# EAGLE board Rear (EAGLE 8.4.1), part 1 of 2
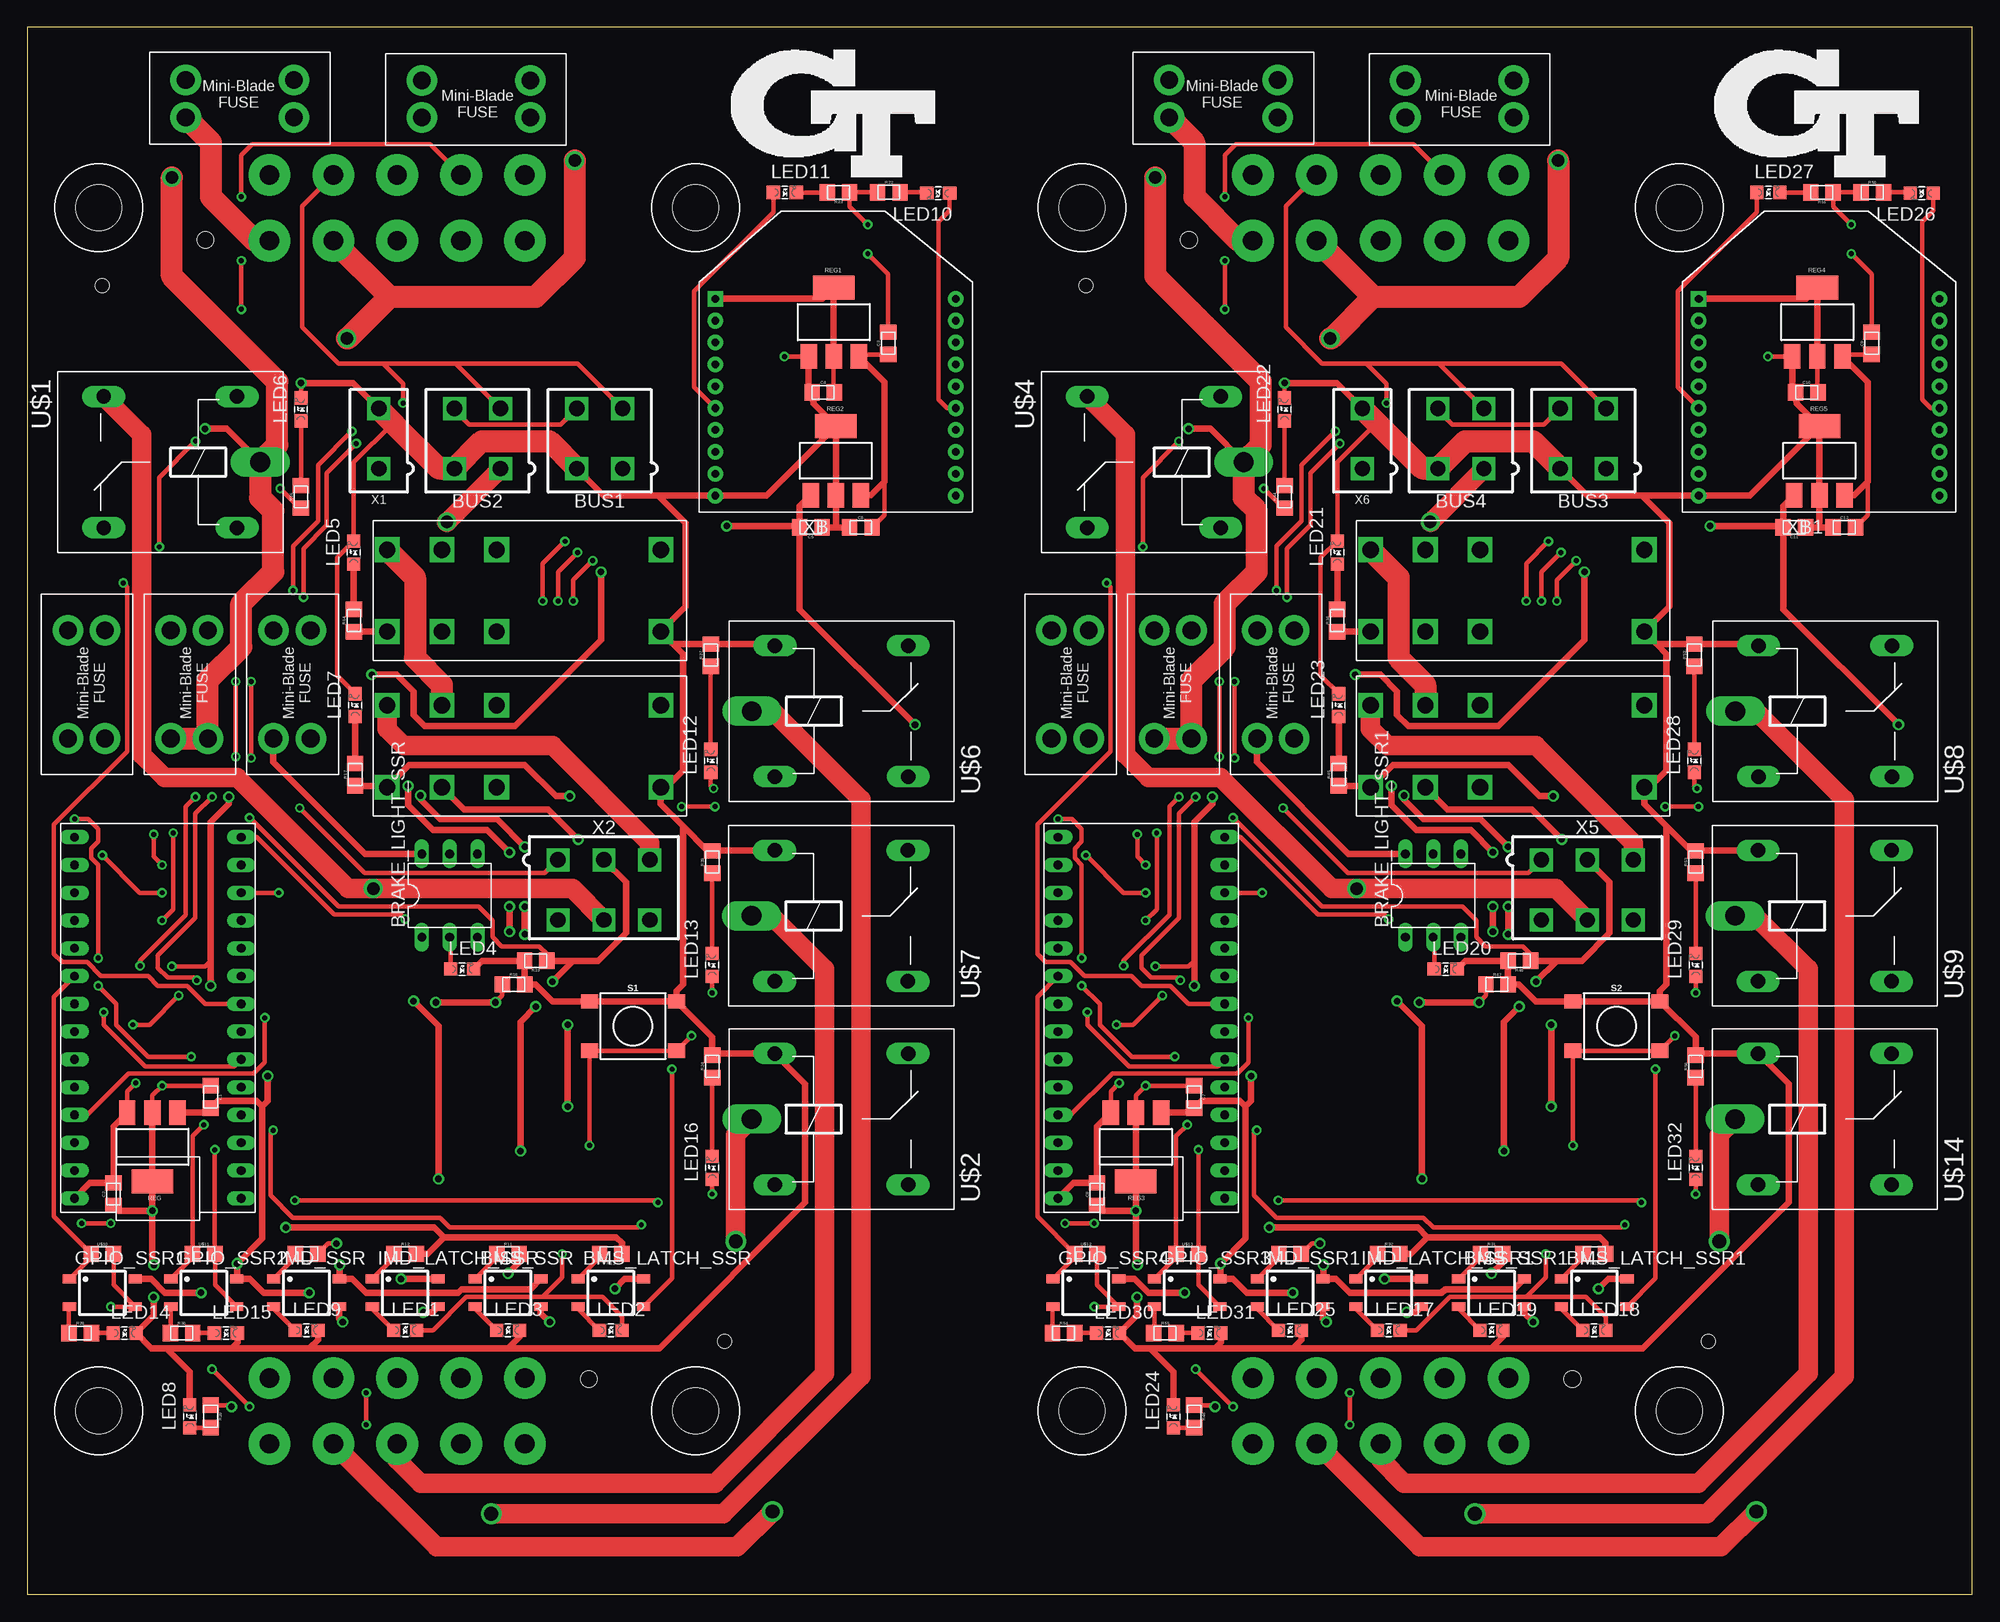
[diagram p0: board, top side]
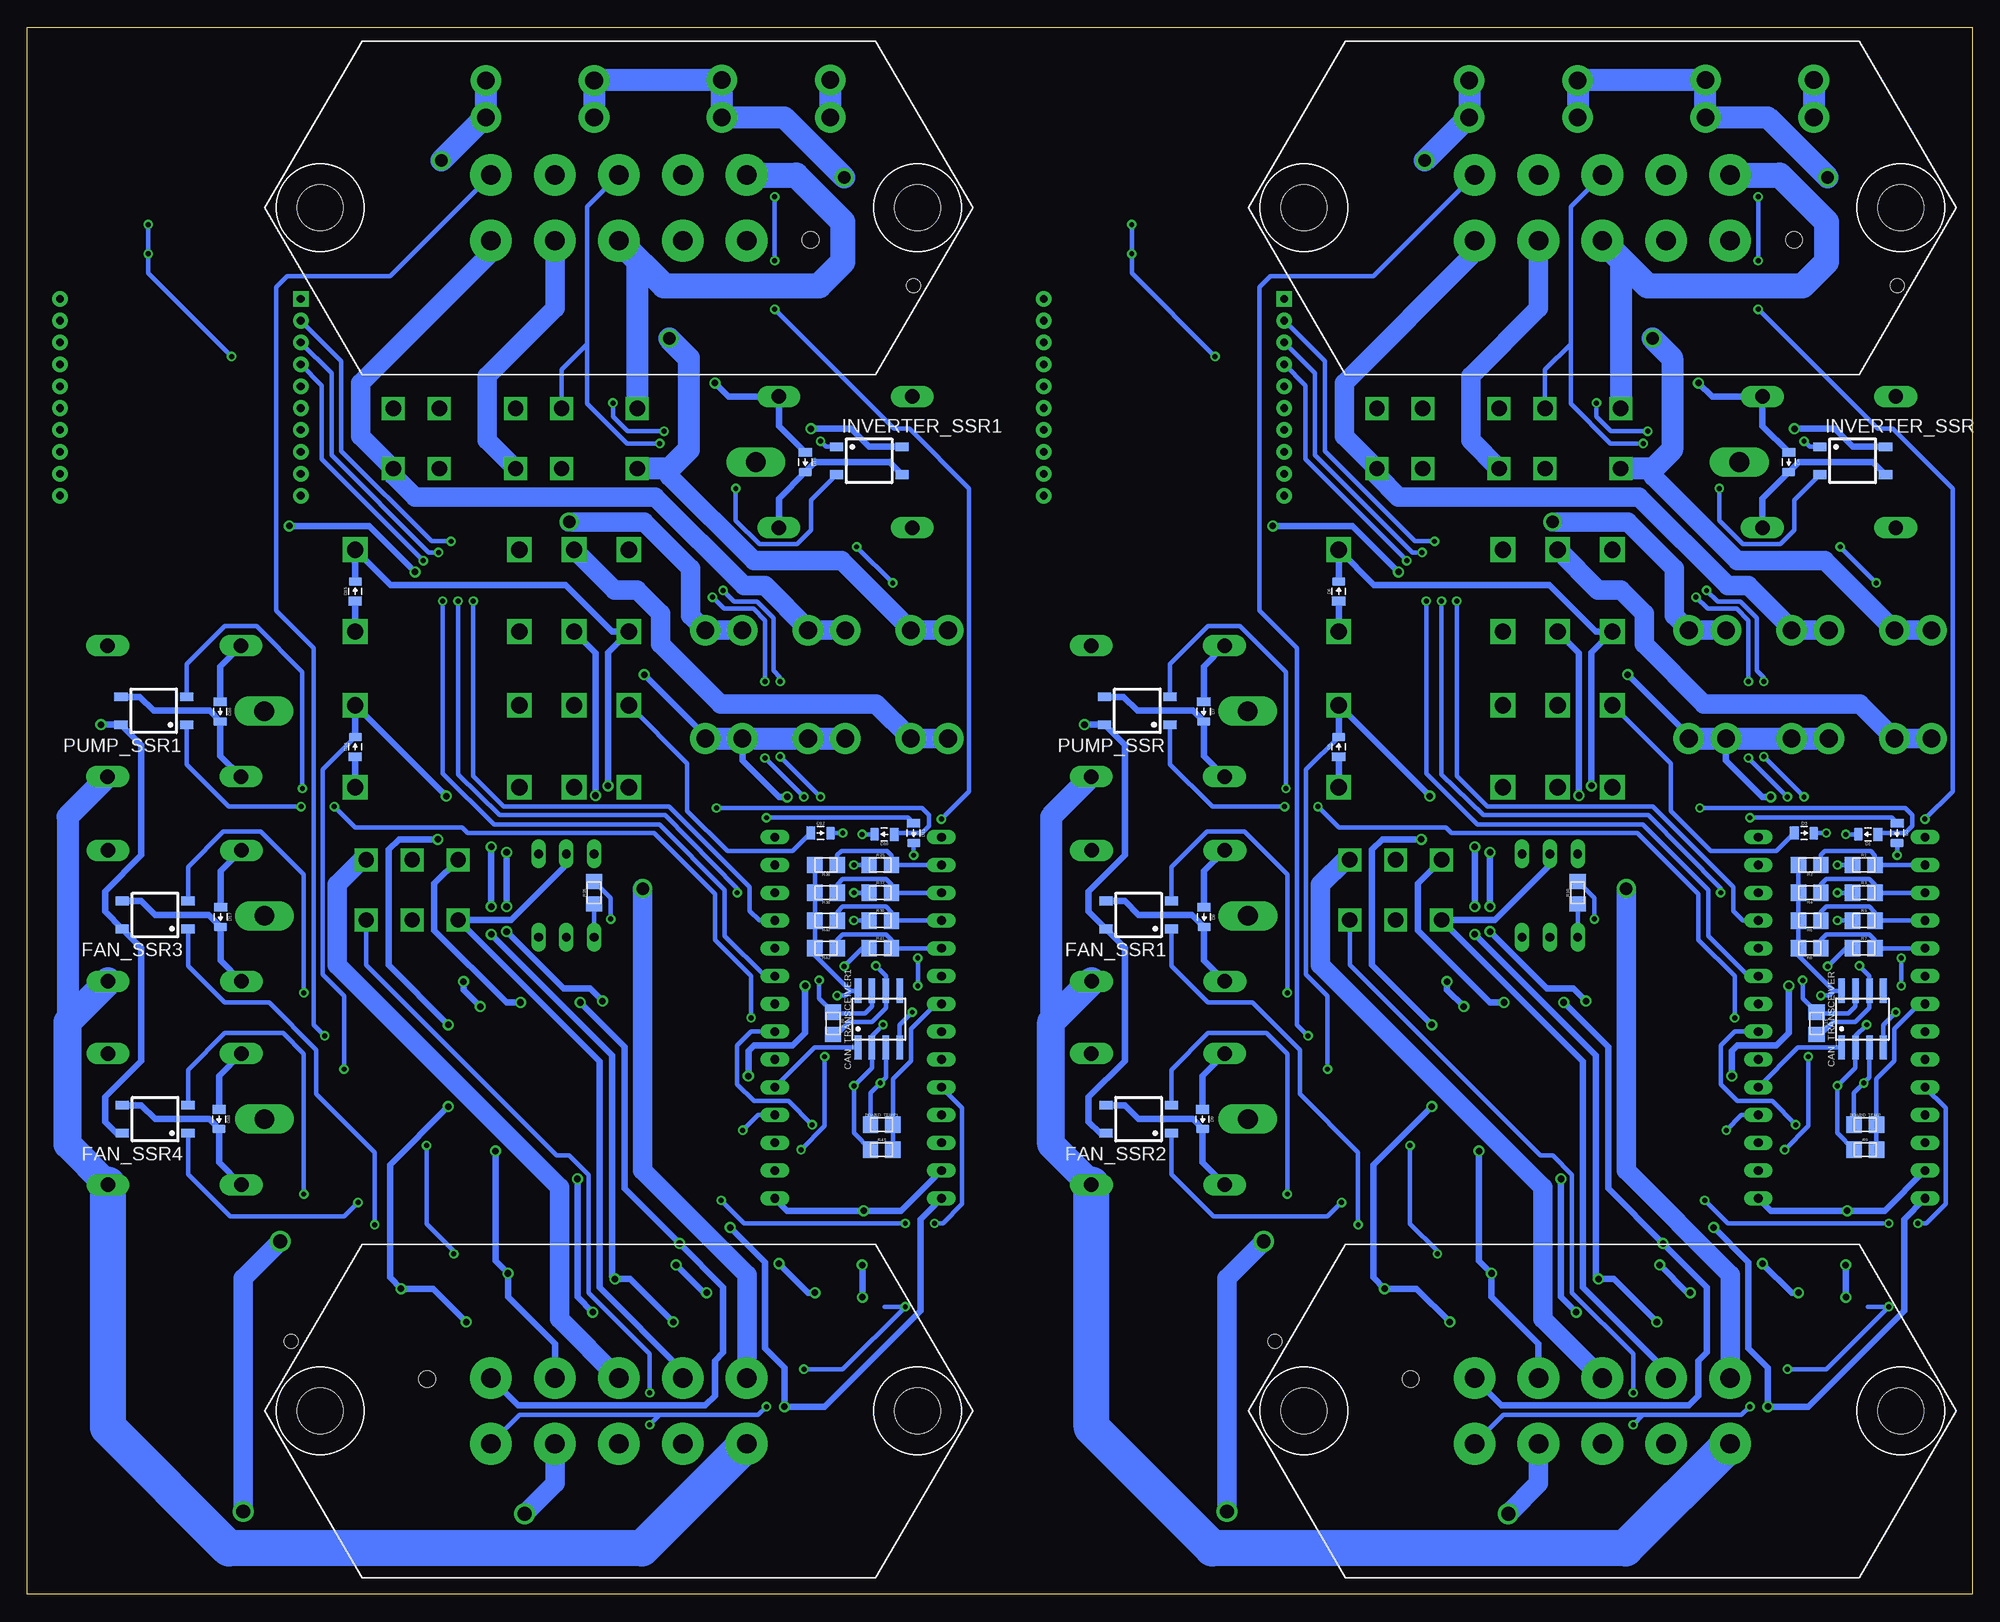
[diagram p1: board, bottom side, seen from below]

Size 177.8 x 143.26 mm. Coordinates in mm from the lower left corner, seen from the top.
Outline: 0,143.26 0,0 177.8,0 177.8,143.26 0,143.26
Copper layers (1*16): Top 0.035mm / dielectric 1.5mm / Bottom 0.035mm
Design rules "DRC Advanced Circuits": minimum track width 10mil, minimum drill 15mil, track to track 6mil, track to pad 6mil, pad to pad 6mil, via to via 6mil, smd to smd 6mil, copper to edge 40mil, drill to drill 6mil, minimum pad ring 10mil, minimum via ring 8mil, stop-mask expansion 4mil, vias tented up to drill 0mil, thermal gap 10mil
Holes 1.27 mm at 6.86,119.63 96.77,119.63 63.75,23.11 153.67,23.11

## Footprints (pad centres in the part's own frame; a part is rotated, then mirrored left to right if it is on the bottom)
SOP04 = smd 0.8 x 1.2: 1 -1.27,-3; 2 1.27,-3; 3 1.27,3; 4 -1.27,3
0805 = smd 1.4 x 1.5: 1 -1.025,0; 2 1.025,0
DIL06 = drill 0.813 long: 1 -2.54,-3.81; 2 0,-3.81; 3 2.54,-3.81; 4 2.54,3.81; 5 0,3.81; 6 -2.54,3.81
MINIFIT_5566-4 = drill 1.4 square: 1 2.1,-2.75; 2 -2.1,-2.75; 3 2.1,2.75; 4 -2.1,2.75
SOIC-08 = smd 0.6 x 2.2: 1 -1.905,-2.6; 2 -0.635,-2.6; 3 0.635,-2.6; 4 1.905,-2.6; 5 1.905,2.6; 6 0.635,2.6; 7 -0.635,2.6; 8 -1.905,2.6
0805_D = smd 0.8 x 1.2: A -0.9,0; C 0.9,0
MINI-BLADE_FUSE_HOLDER = drill 1.613 pad 2.794: L1 0,3.404; L2 0,0; R1 9.906,3.404; R2 9.906,0
G2RL-2 = drill 1.5 square: 2 10.008,0; 3 5.004,0; 4 0,0; 5 0,7.493; 6 5.004,7.493; 7 10.008,7.493; COIL+ 25.019,0; COIL- 25.019,7.493
LED-805 = smd 1.2 x 1.2: A 0,-1.05; C 0,1.05
SOT223 = smd 1.5 x 2.235: 1 -2.3,-3.15; 2 0,-3.15; 3 2.3,-3.15 | smd 3.8 x 2.2: 4 0,3.15
TACTILE_SWITCH_SMD_6.2MM_TALL = smd 1.55 x 1.3: A1 -3.975,-2.25; A2 3.975,-2.25; B1 -3.975,2.25; B2 3.975,2.25
ZF112 = drill 1.321 long: 1 4.064,14.884; 2 4.064,2.896; O 16.256,14.884; S 16.256,2.896 | drill 1.803 long: P 1.956,8.89
TEENSY_3.2_SIMPLE = drill 0.8 long: 3.3V 16.51,29.21; A0 16.51,3.81; A1 16.51,6.35; A2 16.51,8.89; A3 16.51,11.43; A4 16.51,13.97; A5 16.51,16.51; A6 16.51,19.05; A7 16.51,21.59; A8 16.51,24.13; A9 16.51,26.67; AGND 16.51,31.75; D0(RX1) 1.27,31.75; D1(TX1) 1.27,29.21; D2 1.27,26.67; D3(CANTX) 1.27,24.13; D4(CANRX) 1.27,21.59; D5 1.27,19.05; D6 1.27,16.51; D7(RX3) 1.27,13.97; D8(TX3) 1.27,11.43; D9(RX2) 1.27,8.89; D10(TX2) 1.27,6.35; D11 1.27,3.81; D12 1.27,1.27; D13 16.51,1.27; GND 1.27,34.29; VIN 16.51,34.29
MINIFIT_5566-2 = drill 1.4 square: 1 0,-2.75; 2 0,2.75
MINIFIT_5566-6 = drill 1.4 square: 1 4.2,-2.75; 2 0,-2.75; 3 -4.2,-2.75; 4 4.2,2.75; 5 0,2.75; 6 -4.2,2.75
MX150L_VERTICAL-10 = drill 1.778 pad 3.81: 1 -11.684,2.997; 2 -5.842,2.997; 3 0,2.997; 4 5.842,2.997; 5 11.684,2.997; 6 -11.684,-2.997; 7 -5.842,-2.997; 8 0,-2.997; 9 5.842,-2.997; 10 11.684,-2.997 | hole 4.191: -27.292,0; 27.292,0 | hole 1.524: -17.526,2.921
XBEE = drill 0.7 pad 1.422 square: 1 -11,5.5 | drill 0.7 pad 1.422: 2 -11,3.5; 3 -11,1.5; 4 -11,-0.5; 5 -11,-2.5; 6 -11,-4.5; 7 -11,-6.5; 8 -11,-8.5; 9 -11,-10.5; 10 -11,-12.5; 11 11,-12.5; 12 11,-10.5; 13 11,-8.5; 14 11,-6.5; 15 11,-4.5; 16 11,-2.5; 17 11,-0.5; 18 11,1.5; 19 11,3.5; 20 11,5.5

## Placement (x,y rotation side)
BMS_LATCH_SSR  CPC1002N  [SOP04]  53.34,27.56 270 top
BMS_LATCH_SSR1  CPC1002N  [SOP04]  143.26,27.56 270 top
BMS_SSR  CPC1002N  [SOP04]  43.94,27.56 270 top
BMS_SSR1  CPC1002N  [SOP04]  133.86,27.56 270 top
BOARD_TEMP  THERMISTOR_NCP210805  [0805]  9.78,42.93 0 bottom
BOARD_TEMP1  THERMISTOR_NCP210805  [0805]  99.69,42.93 0 bottom
BRAKE_LIGHT_SSR  SOLID_STATE_RELAY_VO14642AT  [DIL06]  38.61,63.88 0 top
BRAKE_LIGHT_SSR1  SOLID_STATE_RELAY_VO14642AT  [DIL06]  128.52,63.88 0 top
BUS1  CONNECTOR-4  [MINIFIT_5566-4]  52.32,105.66 0 top
BUS2  CONNECTOR-4  [MINIFIT_5566-4]  41.15,105.66 0 top
BUS3  CONNECTOR-4  [MINIFIT_5566-4]  142.24,105.66 0 top
BUS4  CONNECTOR-4  [MINIFIT_5566-4]  131.06,105.66 0 top
C1  .22uF  [0805]  16.76,45.47 270 top
C2  .1uF  [0805]  7.87,36.58 90 top
C3  1uF  [0805]  78.7,114.37 90 top
C4  1uF  [0805]  72.76,109.89 0 top
C5  .22uF  [0805]  71.63,97.54 180 top
C6  .1uF  [0805]  76.2,97.54 0 top
C7  .22uF  [0805]  106.68,45.47 270 top
C8  .1uF  [0805]  97.79,36.58 90 top
C9  1uF  [0805]  168.62,114.37 90 top
C10  1uF  [0805]  162.67,109.89 0 top
C11  .22uF  [0805]  161.54,97.54 180 top
C12  .1uF  [0805]  166.12,97.54 0 top
CAN_TRANSCEIVER  MCP2551  [SOIC-08]  10.03,52.58 0 bottom
CAN_TRANSCEIVER1  MCP2551  [SOIC-08]  99.95,52.58 0 bottom
D1  DIODE0805  [0805_D]  9.53,69.47 180 bottom
D2  DIODE0805  [0805_D]  6.86,69.6 270 bottom
D3  DIODE0805  [0805_D]  15.37,69.6 0 bottom
D4  DIODE0805  [0805_D]  16.76,103.5 270 bottom
D5  DIODE0805  [0805_D]  57.91,77.47 90 bottom
D6  DIODE0805  [0805_D]  57.91,91.69 90 bottom
D7  DIODE0805  [0805_D]  70.25,80.7 270 bottom
D8  DIODE0805  [0805_D]  70.22,61.92 270 bottom
D9  DIODE0805  [0805_D]  70.36,43.43 270 bottom
D10  DIODE0805  [0805_D]  99.44,69.47 180 bottom
D11  DIODE0805  [0805_D]  96.77,69.6 270 bottom
D12  DIODE0805  [0805_D]  105.28,69.6 0 bottom
D13  DIODE0805  [0805_D]  106.68,103.5 270 bottom
D14  DIODE0805  [0805_D]  147.83,77.47 90 bottom
D15  DIODE0805  [0805_D]  147.83,91.69 90 bottom
D16  DIODE0805  [0805_D]  160.17,80.7 270 bottom
D17  DIODE0805  [0805_D]  160.14,61.92 270 bottom
D18  DIODE0805  [0805_D]  160.27,43.43 270 bottom
FAN_SSR1  CPC1002N  [SOP04]  76.2,62.1 90 bottom
FAN_SSR2  CPC1002N  [SOP04]  76.2,43.43 90 bottom
FAN_SSR3  CPC1002N  [SOP04]  166.12,62.1 90 bottom
FAN_SSR4  CPC1002N  [SOP04]  166.12,43.43 90 bottom
FH_FUSE  8A  [MINI-BLADE_FUSE_HOLDER]  36.07,135 0 top
FH_FUSE1  8A  [MINI-BLADE_FUSE_HOLDER]  125.98,135 0 top
FSAE_FUSE  8A  [MINI-BLADE_FUSE_HOLDER]  24.38,138.43 180 top
FSAE_FUSE1  8A  [MINI-BLADE_FUSE_HOLDER]  114.3,138.43 180 top
FUSE_BUS_1  5A  [MINI-BLADE_FUSE_HOLDER]  16.51,78.23 90 top
FUSE_BUS_2  5A  [MINI-BLADE_FUSE_HOLDER]  25.91,78.23 90 top
FUSE_BUS_3  5A  [MINI-BLADE_FUSE_HOLDER]  106.43,78.23 90 top
FUSE_BUS_4  5A  [MINI-BLADE_FUSE_HOLDER]  115.82,78.23 90 top
GPIO_SSR1  CPC1002N  [SOP04]  6.86,27.56 270 top
GPIO_SSR2  CPC1002N  [SOP04]  16.13,27.56 270 top
GPIO_SSR3  CPC1002N  [SOP04]  106.05,27.56 270 top
GPIO_SSR4  CPC1002N  [SOP04]  96.77,27.56 270 top
IMD_LATCH_SSR  CPC1002N  [SOP04]  34.54,27.56 270 top
IMD_LATCH_SSR1  CPC1002N  [SOP04]  124.46,27.56 270 top
IMD_SHUTDOWN  G2RL-2-DC12  [G2RL-2]  32.89,88.01 0 top
IMD_SHUTDOWN1  G2RL-2-DC12  [G2RL-2]  32.89,73.79 0 top
IMD_SHUTDOWN2  G2RL-2-DC12  [G2RL-2]  122.81,88.01 0 top
IMD_SHUTDOWN3  G2RL-2-DC12  [G2RL-2]  122.81,73.79 0 top
IMD_SSR  CPC1002N  [SOP04]  25.53,27.56 270 top
IMD_SSR1  CPC1002N  [SOP04]  115.44,27.56 270 top
INVERTER_SSR  CPC1002N  [SOP04]  10.92,103.63 270 bottom
INVERTER_SSR1  CPC1002N  [SOP04]  100.84,103.63 270 bottom
LED1  White  [LED-805]  34.54,24.13 270 top
LED2  White  [LED-805]  53.34,24.13 270 top
LED3  Green  [LED-805]  43.94,24.13 270 top
LED4  Red  [LED-805]  39.75,57.15 270 top
LED5  Yellow  [LED-805]  29.84,95.25 0 top
LED6  Red  [LED-805]  25.02,108.33 0 top
LED7  Green  [LED-805]  29.97,81.28 0 top
LED8  Purple  [LED-805]  14.86,16.26 0 top
LED9  Yellow  [LED-805]  25.53,24.13 270 top
LED10  Red  [LED-805]  83.28,128.08 90 top
LED11  Green  [LED-805]  69.25,128.16 270 top
LED12  Red  [LED-805]  62.48,76.2 0 top
LED13  Red  [LED-805]  62.61,57.53 0 top
LED14  Red  [LED-805]  8.89,23.88 270 top
LED15  Red  [LED-805]  18.16,23.88 270 top
LED16  Red  [LED-805]  62.61,38.99 0 top
LED17  White  [LED-805]  124.46,24.13 270 top
LED18  White  [LED-805]  143.26,24.13 270 top
LED19  Green  [LED-805]  133.86,24.13 270 top
LED20  Red  [LED-805]  129.67,57.15 270 top
LED21  Yellow  [LED-805]  119.76,95.25 0 top
LED22  Red  [LED-805]  114.94,108.33 0 top
LED23  Green  [LED-805]  119.89,81.28 0 top
LED24  Purple  [LED-805]  104.78,16.26 0 top
LED25  Yellow  [LED-805]  115.44,24.13 270 top
LED26  Red  [LED-805]  173.19,128.08 90 top
LED27  Green  [LED-805]  159.17,128.16 270 top
LED28  Red  [LED-805]  152.4,76.2 0 top
LED29  Red  [LED-805]  152.53,57.53 0 top
LED30  Red  [LED-805]  98.81,23.88 270 top
LED31  Red  [LED-805]  108.08,23.88 270 top
LED32  Red  [LED-805]  152.53,38.99 0 top
PUMP_SSR  CPC1002N  [SOP04]  76.33,80.77 90 bottom
PUMP_SSR1  CPC1002N  [SOP04]  166.24,80.77 90 bottom
R1  43k  [0805]  9.91,66.67 0 bottom
R2  12k  [0805]  14.86,66.67 180 bottom
R3  43k  [0805]  9.91,64.14 0 bottom
R4  12k  [0805]  14.86,64.14 180 bottom
R5  43k  [0805]  9.91,61.59 0 bottom
R6  12k  [0805]  14.86,61.59 180 bottom
R7  43k  [0805]  9.91,59.05 0 bottom
R8  12k  [0805]  14.86,59.05 180 bottom
R9  10k  [0805]  9.78,40.64 0 bottom
R10  43  [0805]  36.07,64.14 90 bottom
R11  43  [0805]  43.94,31.11 0 top
R12  33  [0805]  34.54,31.11 0 top
R13  33  [0805]  53.34,31.11 180 top
R14  820  [0805]  29.84,89.03 90 top
R15  120  [0805]  14.22,52.2 270 bottom
R16  43  [0805]  25.02,100.33 90 top
R17  820  [0805]  29.97,74.93 90 top
R18  2.2k  [0805]  44.45,55.75 0 top
R19  10k  [0805]  46.48,57.91 180 top
R20  270  [0805]  16.76,16.26 270 top
R21  820  [0805]  25.53,31.11 180 top
R22  100  [0805]  78.76,128.18 0 top
R23  33  [0805]  74.15,128.17 180 top
R24  33  [0805]  62.61,48.26 90 top
R25  43k  [0805]  99.82,66.67 0 bottom
R26  43  [0805]  125.98,64.14 90 bottom
R27  33  [0805]  62.48,85.85 90 top
R28  33  [0805]  62.61,66.93 90 top
R29  43  [0805]  4.83,23.88 0 top
R30  43  [0805]  14.1,23.88 0 top
R31  43  [0805]  133.86,31.11 0 top
R32  33  [0805]  124.46,31.11 0 top
R33  33  [0805]  143.26,31.11 180 top
R34  820  [0805]  119.76,89.03 90 top
R35  120  [0805]  104.14,52.2 270 bottom
R36  12k  [0805]  104.78,66.67 180 bottom
R37  43k  [0805]  99.82,64.14 0 bottom
R38  12k  [0805]  104.78,64.14 180 bottom
R39  43k  [0805]  99.82,61.59 0 bottom
R40  12k  [0805]  104.78,61.59 180 bottom
R41  43k  [0805]  99.82,59.05 0 bottom
R42  12k  [0805]  104.78,59.05 180 bottom
R43  10k  [0805]  99.69,40.64 0 bottom
R44  43  [0805]  114.94,100.33 90 top
R45  820  [0805]  119.89,74.93 90 top
R46  10k  [0805]  136.4,57.91 180 top
R47  2.2k  [0805]  134.37,55.75 0 top
R48  270  [0805]  106.68,16.26 270 top
R49  820  [0805]  115.44,31.11 180 top
R50  100  [0805]  168.67,128.18 0 top
R51  33  [0805]  164.07,128.17 180 top
R52  33  [0805]  152.4,85.85 90 top
R53  33  [0805]  152.53,66.93 90 top
R54  43  [0805]  94.74,23.88 0 top
R55  43  [0805]  104.01,23.88 0 top
R56  33  [0805]  152.53,48.26 90 top
REG  5V  [SOT223]  11.43,40.89 180 top
REG1  TLV1117LV33  [SOT223]  73.72,116.31 0 top
REG2  5V  [SOT223]  73.91,103.63 0 top
REG3  5V  [SOT223]  101.35,40.89 180 top
REG4  TLV1117LV33  [SOT223]  163.64,116.31 0 top
REG5  5V  [SOT223]  163.83,103.63 0 top
S1  [TACTILE_SWITCH_SMD_6.2MM_TALL]  55.37,51.94 0 top
S2  [TACTILE_SWITCH_SMD_6.2MM_TALL]  145.29,51.94 0 top
SHUTDWN_FUSE  5A  [MINI-BLADE_FUSE_HOLDER]  7.11,78.23 90 top
SHUTDWN_FUSE1  5A  [MINI-BLADE_FUSE_HOLDER]  97.03,78.23 90 top
U$1  G5LE  [ZF112]  23.24,112.39 180 top
U$2  G5LE  [ZF112]  64.26,34.54 0 top
U$3  TEENSY_3.2_SIMPLE  [TEENSY_3.2_SIMPLE]  20.83,70.48 180 top
U$4  G5LE  [ZF112]  113.16,112.39 180 top
U$5  TEENSY_3.2_SIMPLE  [TEENSY_3.2_SIMPLE]  110.74,70.48 180 top
U$6  G5LE  [ZF112]  64.29,71.85 0 top
U$7  G5LE  [ZF112]  64.25,53.13 0 top
U$8  G5LE  [ZF112]  154.2,71.85 0 top
U$9  G5LE  [ZF112]  154.17,53.13 0 top
U$10  JUMPER  [0805]  6.86,31.11 0 top
U$11  JUMPER  [0805]  16.13,31.11 0 top
U$12  JUMPER  [0805]  96.77,31.11 0 top
U$13  JUMPER  [0805]  106.05,31.11 0 top
U$14  G5LE  [ZF112]  154.18,34.54 0 top
X1  CONNECTOR-2  [MINIFIT_5566-2]  32.13,105.66 0 top
X2  CONNECTOR-6  [MINIFIT_5566-6]  52.7,64.39 180 top
X3  CONNECTOR-10MX150L_VERTICAL-10  [MX150L_VERTICAL-10]  33.81,16.75 0 bottom
X4  CONNECTOR-10MX150L_VERTICAL-10  [MX150L_VERTICAL-10]  33.81,126.75 180 bottom
X5  CONNECTOR-6  [MINIFIT_5566-6]  142.62,64.39 180 top
X6  CONNECTOR-2  [MINIFIT_5566-2]  122.05,105.66 0 top
X7  CONNECTOR-10MX150L_VERTICAL-10  [MX150L_VERTICAL-10]  123.73,16.75 0 bottom
X8  CONNECTOR-10MX150L_VERTICAL-10  [MX150L_VERTICAL-10]  123.73,126.75 180 bottom
XB  XBEE  [XBEE]  73.89,112.94 0 top
XB1  XBEE  [XBEE]  163.81,112.94 0 top

## Library data of the parts
BMS_LATCH_SSR BMS_LATCH_SSR1 BMS_SSR BMS_SSR1 BOARD_TEMP BOARD_TEMP1 BRAKE_LIGHT_SSR BRAKE_LIGHT_SSR1 C1-C12 CAN_TRANSCEIVER CAN_TRANSCEIVER1 D1-D18 FAN_SSR1-FAN_SSR4 FH_FUSE FH_FUSE1 FSAE_FUSE FSAE_FUSE1 FUSE_BUS_1-FUSE_BUS_4 GPIO_SSR1-GPIO_SSR4 IMD_LATCH_SSR IMD_LATCH_SSR1 IMD_SHUTDOWN IMD_SHUTDOWN1-IMD_SHUTDOWN3 IMD_SSR IMD_SSR1 INVERTER_SSR INVERTER_SSR1 LED1-LED32 PUMP_SSR PUMP_SSR1 R1-R56 REG REG1-REG5 S1 S2 SHUTDWN_FUSE SHUTDWN_FUSE1 U$1-U$14 X3 X4 X7 X8 XB XB1 = HyTechDevices
BUS1-BUS4 = HyTechDevices; OC_FARNELL: unknown; OC_NEWARK: unknown
X1 X6 = HyTechDevices; OC_FARNELL: 1822072; OC_NEWARK: unknown
X2 X5 = HyTechDevices; MPN: 95566-61002; OC_FARNELL: unknown; OC_NEWARK: 22K8620

## Nets
12V_F1: BUS1.1 FUSE_BUS_1.R1 FUSE_BUS_1.R2 X4.5
12V_F2: BUS2.1 FUSE_BUS_2.R1 FUSE_BUS_2.R2 X4.4
12V_F3: BUS3.1 FUSE_BUS_3.R1 FUSE_BUS_3.R2 X8.5
12V_F4: BUS4.1 FUSE_BUS_4.R1 FUSE_BUS_4.R2 X8.4
12VSUPPLY_BRB: FH_FUSE.R1 FH_FUSE.R2 SHUTDWN_FUSE.R1 SHUTDWN_FUSE.R2 X1.1 X4.2
12VSUPPLY_BRB1: FH_FUSE1.R1 FH_FUSE1.R2 SHUTDWN_FUSE1.R1 SHUTDWN_FUSE1.R2 X6.1 X8.2
12VSUPPLY_FSAE: FSAE_FUSE.R1 FSAE_FUSE.R2 X4.1
12VSUPPLY_FSAE1: FSAE_FUSE1.R1 FSAE_FUSE1.R2 X8.1
12VSUPPLY_READ: R7.2 R8.1 U$3.A3
12VSUPPLY_READ1: R41.2 R42.1 U$5.A3
+5V: BOARD_TEMP.1 C2.2 CAN_TRANSCEIVER.3 R12.2 R13.1 R20.1 REG.3 U$3.VIN
+5V1: BOARD_TEMP1.1 C8.2 CAN_TRANSCEIVER1.3 R32.2 R33.1 R48.1 REG3.3 U$5.VIN
+12V: BMS_SSR.4 BRAKE_LIGHT_SSR.6 C1.2 C5.2 FAN_SSR1.4 FAN_SSR2.4 FH_FUSE.L1 FH_FUSE.L2 FSAE_FUSE.L1 FSAE_FUSE.L2 FUSE_BUS_1.L1 FUSE_BUS_1.L2 FUSE_BUS_2.L1 FUSE_BUS_2.L2 GPIO_SSR1.4 GPIO_SSR2.4 IMD_SSR.4 INVERTER_SSR.4 PUMP_SSR.4 R7.1 REG2.1 REG.1 U$1.P
+12V1: BMS_SSR1.4 BRAKE_LIGHT_SSR1.6 C7.2 C11.2 FAN_SSR3.4 FAN_SSR4.4 FH_FUSE1.L1 FH_FUSE1.L2 FSAE_FUSE1.L1 FSAE_FUSE1.L2 FUSE_BUS_3.L1 FUSE_BUS_3.L2 FUSE_BUS_4.L1 FUSE_BUS_4.L2 GPIO_SSR3.4 GPIO_SSR4.4 IMD_SSR1.4 INVERTER_SSR1.4 PUMP_SSR1.4 R41.1 REG3.1 REG5.1 U$4.P
BMS_COIL_PWR: BMS_LATCH_SSR.3 D5.C IMD_SHUTDOWN1.4 IMD_SHUTDOWN1.COIL- R17.1
BMS_COIL_PWR1: BMS_LATCH_SSR1.3 D14.C IMD_SHUTDOWN3.4 IMD_SHUTDOWN3.COIL- R45.1
BMS_OK: D2.A R11.2 R19.1 X2.2 X3.2
BMS_OK1: D11.A R31.2 R46.1 X5.2 X7.2
BMS_OK_READ: R3.2 R4.1 U$3.A1
BMS_OK_READ1: R37.2 R38.1 U$5.A1
BMS_PWR_STEP: BMS_LATCH_SSR.4 BMS_SSR.3 IMD_SHUTDOWN1.3
BMS_PWR_STEP1: BMS_LATCH_SSR1.4 BMS_SSR1.3 IMD_SHUTDOWN3.3
BRAKE_LIGHT: BRAKE_LIGHT_SSR.5 X2.4 X3.4
BRAKE_LIGHT1: BRAKE_LIGHT_SSR1.5 X5.4 X7.4
BRAKE_LIGHT_CTRL: R10.2 U$3.D12
BRAKE_LIGHT_CTRL1: R26.2 U$5.D12
CANH: BUS1.4 BUS2.4 CAN_TRANSCEIVER.7 R15.1 X4.8
CANH1: BUS3.4 BUS4.4 CAN_TRANSCEIVER1.7 R35.1 X8.8
CANL: BUS1.3 BUS2.3 CAN_TRANSCEIVER.6 R15.2 X4.7
CANL1: BUS3.3 BUS4.3 CAN_TRANSCEIVER1.6 R35.2 X8.7
FAN1-: U$7.P X3.8
FAN1-1: U$9.P X7.8
FAN2-: U$2.P X3.9
FAN2-1: U$14.P X7.9
GND: BUS1.2 BUS2.2 C1.1 C2.1 C3.2 C4.1 C5.1 C6.1 CAN_TRANSCEIVER.2 CAN_TRANSCEIVER.8 D4.A D5.A D6.A D7.A D8.A D9.A IMD_SHUTDOWN1.COIL+ IMD_SHUTDOWN.COIL+ LED3.C LED4.C LED5.C LED6.C LED7.C LED8.C LED9.C LED14.C LED15.C R2.2 R4.2 R6.2 R8.2 R9.1 R18.2 R19.2 R22.1 R23.1 R24.2 R27.2 R28.2 REG1.1 REG2.2 REG2.4 REG.2 REG.4 S1.B1 S1.B2 U$1.2 U$2.1 U$3.AGND U$3.GND U$6.1 U$7.1 X1.2 X4.3 X4.6 XB.10
GND1: U$2.S U$6.S U$7.S X3.10
GND2: BUS3.2 BUS4.2 C7.1 C8.1 C9.2 C10.1 C11.1 C12.1 CAN_TRANSCEIVER1.2 CAN_TRANSCEIVER1.8 D13.A D14.A D15.A D16.A D17.A D18.A IMD_SHUTDOWN2.COIL+ IMD_SHUTDOWN3.COIL+ LED19.C LED20.C LED21.C LED22.C LED23.C LED24.C LED25.C LED30.C LED31.C R36.2 R38.2 R40.2 R42.2 R43.1 R46.2 R47.2 R50.1 R51.1 R52.2 R53.2 R56.2 REG3.2 REG3.4 REG4.1 REG5.2 REG5.4 S2.B1 S2.B2 U$4.2 U$5.AGND U$5.GND U$8.1 U$9.1 U$14.1 X6.2 X8.3 X8.6 XB1.10
GND3: U$8.S U$9.S U$14.S X7.10
GPIO_1: GPIO_SSR1.3 U$10.2 X2.6 X3.6
GPIO_2: GPIO_SSR2.3 U$11.2 X4.9
GPIO_3: GPIO_SSR3.3 U$13.2 X8.9
GPIO_4: GPIO_SSR4.3 U$12.2 X5.6 X7.6
GPIO_CTRL1: GPIO_SSR1.1 U$3.A4 U$10.1
GPIO_CTRL2: GPIO_SSR2.1 U$3.D5 U$11.1
GPIO_CTRL3: GPIO_SSR3.1 U$5.D5 U$13.1
GPIO_CTRL4: GPIO_SSR4.1 U$5.A4 U$12.1
IMD_COIL_PWR: D6.C IMD_LATCH_SSR.3 IMD_SHUTDOWN.4 IMD_SHUTDOWN.COIL- R14.1
IMD_COIL_PWR1: D15.C IMD_LATCH_SSR1.3 IMD_SHUTDOWN2.4 IMD_SHUTDOWN2.COIL- R34.1
IMD_PWR_STEP: IMD_LATCH_SSR.4 IMD_SHUTDOWN.3 IMD_SSR.3
IMD_PWR_STEP1: IMD_LATCH_SSR1.4 IMD_SHUTDOWN2.3 IMD_SSR1.3
INVERTER_CTRL: INVERTER_SSR.1 U$3.D6
INVERTER_CTRL1: INVERTER_SSR1.1 U$5.D6
INVERTER_SUPPLY: U$1.S X2.5 X3.5
INVERTER_SUPPLY1: U$4.S X5.5 X7.5
LATCH_EXT_BUTTON: LED1.C LED2.C S1.A1 S1.A2 X4.10
LATCH_EXT_BUTTON1: LED17.C LED18.C S2.A1 S2.A2 X8.10
N$1: IMD_LATCH_SSR.2 LED1.A
N$2: CAN_TRANSCEIVER.4 U$3.D4(CANRX)
N$3: CAN_TRANSCEIVER.1 U$3.D3(CANTX)
N$4: D7.C PUMP_SSR.3 U$6.2
N$5: IMD_LATCH_SSR.1 R12.1
N$6: GPIO_SSR1.2 R29.1
N$7: BRAKE_LIGHT_SSR.2 LED4.A
N$8: GPIO_SSR2.2 R30.1
N$9: BMS_SSR.2 LED3.A
N$10: LED10.A XB.15
N$11: LED10.C R22.2
N$12: BMS_LATCH_SSR.1 R13.2
N$13: LED14.A R29.2
N$14: LED15.A R30.2
N$15: BOARD_TEMP.2 R9.2 U$3.A5
N$16: BMS_LATCH_SSR.2 LED2.A
N$17: BRAKE_LIGHT_SSR.1 R10.1
N$18: BMS_SSR.1 R11.1
N$19: LED5.A R14.2
N$20: D8.C FAN_SSR1.3 U$7.2
N$21: D9.C FAN_SSR2.3 U$2.2
N$22: D1.C R1.1
N$23: D2.C R3.1
N$24: D3.C R5.1
N$25: LED11.A XB.6
N$26: D4.C INVERTER_SSR.3 U$1.1
N$27: INVERTER_SSR.2 R16.1
N$28: LED6.A R16.2
N$29: LED8.A R20.2
N$30: LED16.C R24.1
N$31: IMD_SSR.1 R21.2
N$32: LED7.A R17.2
N$33: LED11.C R23.2
N$34: IMD_SSR.2 LED9.A
N$35: C3.1 C6.2 REG1.3 REG2.3
N$36: LED13.C R28.1
N$37: LED12.C R27.1
N$38: LED12.A PUMP_SSR.2
N$39: FAN_SSR2.2 LED16.A
N$40: CAN_TRANSCEIVER1.4 U$5.D4(CANRX)
N$41: CAN_TRANSCEIVER1.1 U$5.D3(CANTX)
N$42: FAN_SSR1.2 LED13.A
N$43: BOARD_TEMP1.2 R43.2 U$5.A5
N$44: IMD_LATCH_SSR1.2 LED17.A
N$45: BMS_SSR1.2 LED19.A
N$46: BMS_SSR1.1 R31.1
N$47: BRAKE_LIGHT_SSR1.2 LED20.A
N$48: BRAKE_LIGHT_SSR1.1 R26.1
N$49: LED21.A R34.2
N$50: D10.C R25.1
N$51: D11.C R37.1
N$52: D12.C R39.1
N$53: D13.C INVERTER_SSR1.3 U$4.1
N$54: INVERTER_SSR1.2 R44.1
N$55: LED22.A R44.2
N$56: IMD_LATCH_SSR1.1 R32.1
N$57: BMS_LATCH_SSR1.2 LED18.A
N$58: BMS_LATCH_SSR1.1 R33.2
N$59: LED23.A R45.2
N$60: LED24.A R48.2
N$61: IMD_SSR1.2 LED25.A
N$62: IMD_SSR1.1 R49.2
N$63: LED26.A XB1.15
N$64: LED26.C R50.2
N$65: LED27.C R51.2
N$66: LED27.A XB1.6
N$67: C9.1 C12.2 REG4.3 REG5.3
N$68: D16.C PUMP_SSR1.3 U$8.2
N$69: D17.C FAN_SSR3.3 U$9.2
N$70: LED29.C R53.1
N$71: LED28.C R52.1
N$72: LED28.A PUMP_SSR1.2
N$73: FAN_SSR3.2 LED29.A
N$74: GPIO_SSR4.2 R54.1
N$75: GPIO_SSR3.2 R55.1
N$76: LED30.A R54.2
N$77: LED31.A R55.2
N$78: D18.C FAN_SSR4.3 U$14.2
N$79: LED32.C R56.1
N$80: FAN_SSR4.2 LED32.A
OKHS: D1.A R18.1 R21.1 X2.1 X3.1
OKHS1: D10.A R47.1 R49.1 X5.1 X7.1
OKHS_READ: R1.2 R2.1 U$3.A0
OKHS_READ1: R25.2 R36.1 U$5.A0
PUMP1-: U$6.P X3.7
PUMP1-1: U$8.P X7.7
RELAY_CTRL1: PUMP_SSR.1 U$3.A9
RELAY_CTRL2: FAN_SSR1.1 U$3.D2
RELAY_CTRL3: FAN_SSR2.1 U$3.A8
RELAY_CTRL4: FAN_SSR3.1 U$5.D2
RELAY_CTRL5: PUMP_SSR1.1 U$5.A9
RELAY_CTRL6: FAN_SSR4.1 U$5.A8
SHUTDOWN_A: IMD_SHUTDOWN.6 SHUTDWN_FUSE.L1 SHUTDWN_FUSE.L2
SHUTDOWN_A1: IMD_SHUTDOWN2.6 SHUTDWN_FUSE1.L1 SHUTDWN_FUSE1.L2
SHUTDOWN_B: IMD_SHUTDOWN1.6 IMD_SHUTDOWN.5
SHUTDOWN_B1: IMD_SHUTDOWN2.5 IMD_SHUTDOWN3.6
SHUTDOWN_C: D3.A IMD_SHUTDOWN1.5 X2.3 X3.3
SHUTDOWN_C1: D12.A IMD_SHUTDOWN3.5 X5.3 X7.3
SHUTDOWN_OUT_READ: R5.2 R6.1 U$3.A2
SHUTDOWN_OUT_READ1: R39.2 R40.1 U$5.A2
VCC: C4.2 REG1.2 REG1.4 XB.1
VCC1: C10.2 REG4.2 REG4.4 XB1.1
XB1: U$5.D7(RX3) XB1.4
XB8: U$3.D7(RX3) XB.4
XBDI: U$3.D10(TX2) XB.3
XBDI1: U$5.D10(TX2) XB1.3
XBDO: U$3.D9(RX2) XB.2
XBDO1: U$5.D9(RX2) XB1.2